# EAGLE board GMSN Super Skiff Power v1 20170629 (EAGLE 8.2.2)
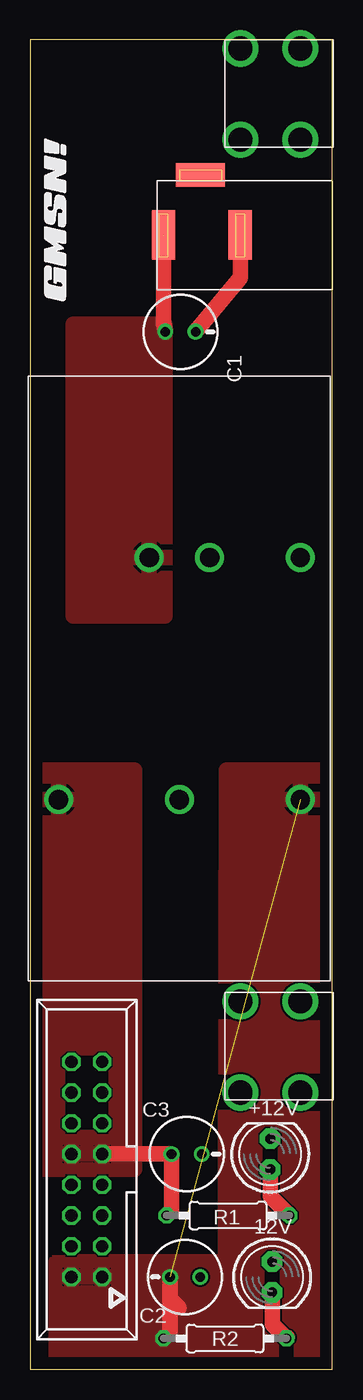
[diagram p0: board, top side]
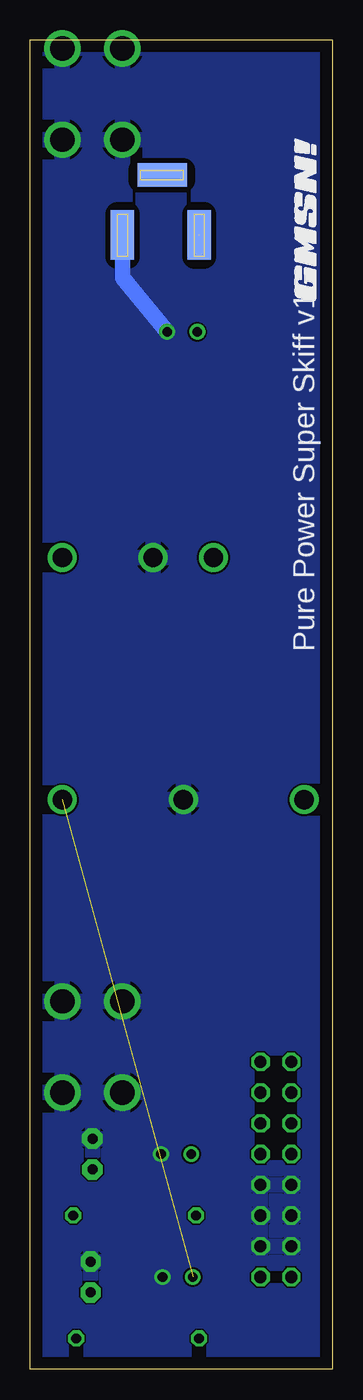
[diagram p1: board, bottom side, seen from below]

Size 25 x 109.84 mm. Coordinates in mm from the lower left corner, seen from the top.
Outline: 0,109.84 0,0 25,0 25,109.84 0,109.84
Copper layers (1*16): Top 0.035mm / dielectric 1.5mm / Bottom 0.035mm
Design rules "default": minimum track width 6mil, minimum drill 0.35mm, track to track 6mil, track to pad 6mil, pad to pad 6mil, via to via 6mil, smd to smd 6mil, copper to edge 40mil, drill to drill 6mil, minimum pad ring 10mil, minimum via ring 8mil, stop-mask expansion 4mil, vias tented up to drill 0mil, thermal gap 10mil

## Footprints (pad centres in the part's own frame; a part is rotated, then mirrored left to right if it is on the bottom)
LED5MM = drill 0.813 pad 1.676 octagon: A -1.27,0; K 1.27,0
SANYO-OSCON_D = drill 0.8 pad 1.27: + 1.25,0; - -1.25,0
0207/10 = drill 0.813 octagon: 1 -5.08,0; 2 5.08,0
URA241XLD-20WR3 = drill 1.6: P$1 -15,0; P$2 -15,-5; P$3 5,-12.5; P$4 5,-2.5; P$5 5,7.5; P$6 -15,7.5
DC-POWER = smd 4.064 x 1.93 bottom: PINBOT 0,13.97; SLEEVEBOT 0,7.62 | smd 4.064 x 1.93: PINTOP 0,13.97; SLEEVETOP 0,7.62 | smd 1.93 x 4.064 bottom: SWITCHBOT 4.953,10.922 | smd 1.93 x 4.064: SWITCHTOP 4.953,10.922
POWER_SHROUDED = drill 1 octagon: 3G -6.35,-1.27; 4G -6.35,1.27; 5G -3.81,-1.27; 6G -3.81,1.27; 7G -1.27,-1.27; 8G -1.27,1.27; +5 3.81,-1.27; +5A 3.81,1.27; +12 1.27,-1.27; +12A 1.27,1.27; -12 -8.89,-1.27; -12A -8.89,1.27; CV 6.35,-1.27; CVA 6.35,1.27; GATE 8.89,-1.27; GATEA 8.89,1.27
PCB-2-MOUNTING = drill 2: P$1 0,7.54; P$2 4.96,7.54; P$3 4.96,0; P$4 0,0

## Placement (x,y rotation side)
+12V  [LED5MM]  19.85,17.78 90 top
-12V  [LED5MM]  20.01,7.62 270 top
C1  100uF  [SANYO-OSCON_D]  12.43,85.73 180 top
C2  100uF  [SANYO-OSCON_D]  12.81,7.62 0 top
C3  100uF  [SANYO-OSCON_D]  12.94,17.78 180 top
R1  47k  [0207/10]  16.36,12.7 180 top
R2  47k  [0207/10]  16.11,2.54 180 top
U$1  URA241XLD-20WR3  [URA241XLD-20WR3]  14.84,52.07 270 top
U$2  DC-POWER  [DC-POWER]  25,93.73 90 top
U$3  EURO_POWER_16  [POWER_SHROUDED]  4.68,16.51 90 top
U$4  [GMSN!_LOGO]  2.14,95.25 90 top
U$5  [GMSN!_LOGO]  2.14,95.25 90 bottom
U$6  PCB-2-MOUNTING  [PCB-2-MOUNTING]  17.38,101.6 0 top
U$8  PCB-2-MOUNTING  [PCB-2-MOUNTING]  17.38,22.86 0 top

## Library data of the parts
+12V -12V C1-C3 R1 R2 U$1-U$6 U$8 = GMSN

## Nets
+12V: C3.+ R1.2 U$1.P$3 U$3.+12 U$3.+12A
-12V: C2.- R2.2 U$1.P$5 U$3.-12 U$3.-12A
GND: +12V.K -12V.A C1.- C2.+ C3.- U$1.P$1 U$1.P$4 U$2.SLEEVEBOT U$2.SLEEVETOP U$3.3G U$3.4G U$3.5G U$3.6G U$3.7G U$3.8G U$6.P$1 U$6.P$2 U$6.P$3 U$6.P$4 U$8.P$1 U$8.P$2 U$8.P$3 U$8.P$4
N$2: C1.+ U$1.P$2 U$2.PINBOT U$2.PINTOP
N$4: +12V.A R1.1
N$5: -12V.K R2.1

## Tracks (layer width: path | path; a pad name or v marks a point on that pad's centre or on a via)
+12V
  Top 1.27: U$3.+12 C3.+ 11.69,13.1 R1.2
  pour Top: 8.62,49.53 8.62,16.51 -0.27,16.51 -0.27,49.53
-12V  (1 unrouted)
  Top 1.27: R2.2 11.56,3.07 C2.- 11.56,5.82 12.3,5.08
  pour Top: 25.13,0 16.11,0 16.24,49.53 25.13,49.53
  pour Top: 16.11,0 2.14,0 2.14,8.89 16.11,8.89
GND
  Top 1.27: U$2.SLEEVETOP 17.38,90.19 C1.-
  Bottom 1.27: C1.- 17.38,90.19 U$2.SLEEVETOP
  pour Bottom: 25.13,109.22 25.13,0 -0.27,0 -0.27,109.22
N$2  (1 unrouted)
  Top 1.27: U$2.PINTOP 11.03,86.38 C1.+
  pour Top: 3.54,62.23 11.16,62.23 11.16,86.36 3.54,86.36
N$4
  Top 1.27: +12V.A 19.85,14.29 R1.1
N$5
  Top 1.27: 21.28,2.63 R2.1 20.01,3.72 -12V.K

## Text on the board
bNames: Pure Power Super Skiff v1